# Altium PCB brd.PcbDoc
Units mm, origin at the board's own origin, x right, y up, seen from the top; angles counter-clockwise.
Board outline 79 x 50 mm, 2 copper layers (Top Layer, Bottom Layer); 10 components, 19 nets, 64 pads, 0 vias.
Unrouted connection lines stored in the file: 1.
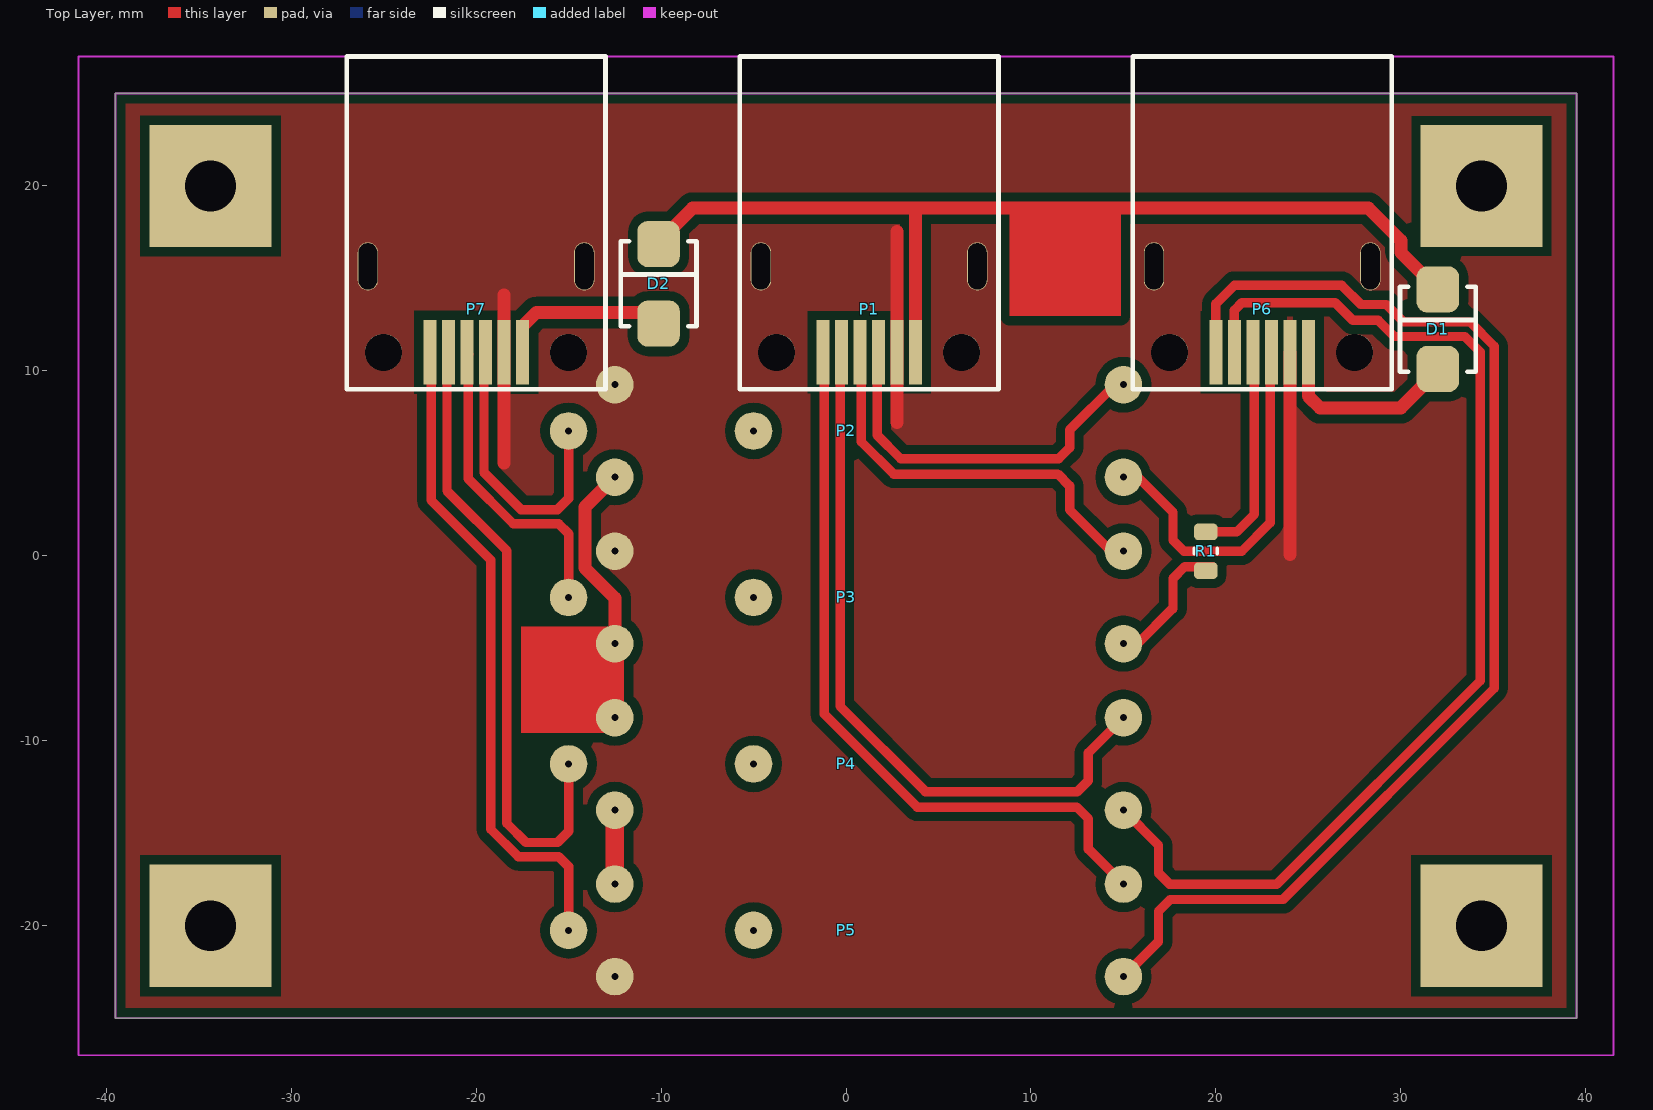
[diagram p0: Top Layer view]
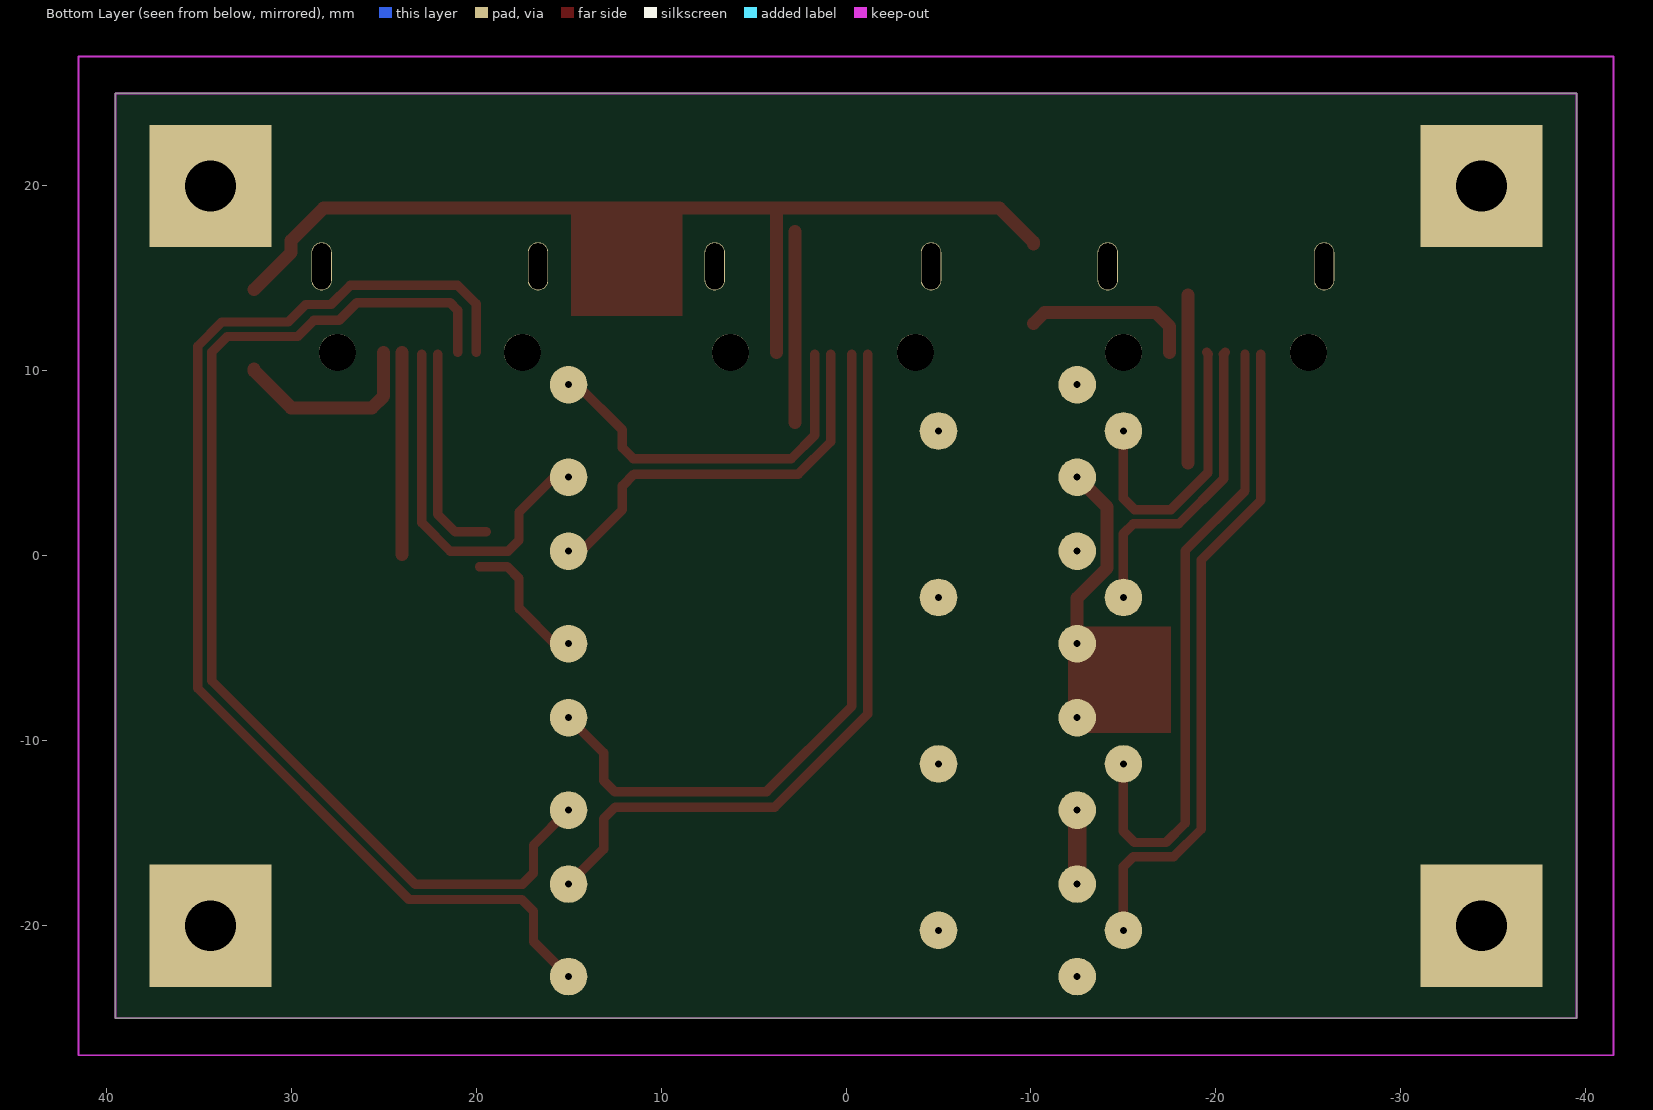
[diagram p1: Bottom Layer view, seen from below]

## Layer stack, top to bottom
Top Solder: solder mask 0.0102, Solder Resist, Dk 3.5
Top Layer: signal copper 0.0356
Dielectric 1: dielectric 0.32, FR-4, Dk 4.8
Bottom Layer: signal copper 0.0356
Bottom Solder: solder mask 0.0102, Solder Resist, Dk 3.5

## Board outline
-39.5,-25 39.5,-25 39.5,25 -39.5,25

## Design rules (kind name [scope] priority, off if disabled: settings)
Clearance [All] p1: gap=0.254 ignorepadtopadclearanceinfootprint=FALSE except(0: Arc-Hole Track-Hole SMDPad-Hole THPad-Hole Via-Hole Fill-Hole Poly-Hole Region-Hole Text-Hole; 0.5: Arc-Fill Arc-Poly Arc-Region Track-Fill Track-Poly Track-Region SMDPad-Fill SMDPad-Poly SMDPad-Region THPad-Fill THPad-Poly THPad-Region Via-Fill Via-Poly Via-Region Fill-Fill Fill-Poly Fill-Region Poly-Poly Poly-Region Region-Region)
ComponentClearance [All] p1 off: gap=0.254 collisioncheckmode=3 verticalgap=0.254 showdistances=FALSE
PolygonConnect [All] p1: connectstyle=Direct reliefconductorwidth=0.254 reliefentries=4 polygonreliefangle="90 Angle" airgapwidth=0.254
RoutingVias [All] p1: holewidth=0.711 width=1.27 viastyle="Through Hole" minholewidth=0.711 minwidth=1.27 maxholewidth=0.711 maxwidth=1.27
SolderMaskExpansion [All] p1: expansion=0.102
Width [All] p1: maxlimit=25.4 minlimit=0.127 preferedwidth=0.254
29 further rules are at their usual default settings.

## Components (designator, comment, footprint, x,y, rotation, side; value= is the part's Value field where it differs from the comment)
D1 "SS16" RR_SMB 32,12.25 r90 top value="DIODE SCHOTTKY 60V 1A SMA"
D2 "SS16" RR_SMB -10.135,14.707 r90 top value="DIODE SCHOTTKY 60V 1A SMA"
P1 "FireWire 356921650" DS1102 1.25,11 r180 top
P2 "18284" RES55A -5,6.75 r180 top
P3 "18284" RES55A -5,-2.25 r180 top
P4 "61469" RES55A -5,-11.25 r180 top
P5 "61469" RES55A -5,-20.25 r180 top
P6 "FireWire 356921650" DS1102 22.5,11 r180 top
P7 "FireWire 356921650" DS1102 -20,11 r180 top
R1 "Res1" 0805 19.455,0.25 r270 top value=1K

## Footprints (in the part's own frame and the unit in brackets; to place one, negate y for a bottom-side part, rotate by r counter-clockwise, add the part's x,y. Pads: shape width x height; smd on the part's side, far side on the other; paste and mask are expansions set on the pad)
0805 [mm] "Chip Capacitor"
  rrect50% 0.9x1.27 smd: 1(-1.05,0) 2(1.05,0)
  silkscreen extent -0.15,-0.63 0.15,0.63, body extent -1.05,-0.67 1.05,0.68, height 0.8
DS1102 [mm]
  rect 0.7x3.5 smd: 1(-2.5,0) 2(-1.5,0) 3(-0.5,0) 4(0.5,0) 5(1.5,0) 6(2.5,0)
  round 2 hole 2: 7(-5,0) 7(5,0)
  oval 1.1x2.6 hole 1 slot 2.5 at 90 deg: 8(-5.85,-4.65) 8(5.85,-4.65)
  silkscreen extent -7,-16 7,2
RES55A [mil]
  round 80 hole 15: 0(0,0) 1(-787.4,98.43) 2(-787.4,-98.43) 3(393.7,0) 4(295.28,-98.43) 5(295.28,98.43)
  body extent -768,-177 374,177, height 394
RR_SMB [mm]
  rrect50% 2.5x2.3 smd mask+0.025: 1(-2.15,0) 2(2.15,0)
  silkscreen extent -2.3,-2.05 2.3,2.05, body extent -2.75,-1.93 2.85,2.02, height 2.65

## Part data
D1 D2: "DIODE SCHOTTKY 60V 1A SMA", Manufacturer=FairchildSemiconductor, Package=SMA, Cost=0,43, Order Number=SS16T3G
P1 P6 P7: library part "Header 8", "IEEE 1394 (DS1102), SMD розетка на плату (OBSOLETE)", LatestRevisionDate=17-Jul-2002, LatestRevisionNote="Re-released for DXP Platform.", Publisher="Altium Limited"
P2 P3 P4 P5: library part "Header 5", "Header, 5-Pin", LatestRevisionDate=17-Jul-2002, LatestRevisionNote="Re-released for DXP Platform.", Publisher="Altium Limited"
R1: "Resistor", LatestRevisionDate=17-Jul-2002, LatestRevisionNote="Re-released for DXP Platform.", PackageDescription="Axial Device, Thru-Hole; 2 Leads; 0.3 in Pin Spacing", PackageReference=AXIAL-0.3, Published=8-Jun-2000, Publisher="Altium Limited"

## Free pads (board coordinates)
  rect 6.6x6.6 hole 2.75: M(-34.35,-20) M(-34.35,20) M(34.35,-20) M(34.35,20)

## Nets (pads, with @x,y where several pads share a name; then routed paths per layer and width w, separated by ;. In a path a pad name is that pad's centre, name@x,y a point inside that pad or via, vN(x,y) a via of type N, cw(c..) or ccw(c..) an arc to the next point about the centre after c; other vN are vias at no path point)
GND: P1.2 P1.7 P1.8 P2.4 P3.4 P5.5 P6.2 P6.7 P6.8 P7.2 P7.7 P7.8 | length 30.3
  Top Layer w0.7: -18.5,5.029 P7.2 -18.5,14.097 ; 2.75,7.214 P1.2 2.75,17.526 ; 24,0.076 P6.2
NetD1_1: D1.1 P6.1 | length 10.6
  Top Layer w0.7: P6.1 25,8.63 25.629,8.001 30.001,8.001 32,10 D1.1
NetD1_2: D1.2 D2.2 P1.1 | length 52.9
  Top Layer w0.7: D2.2 -10.135,16.957 -8.295,18.796 28.251,18.796 29.997,17.05 29.997,16.403 D1.2 ; P1.1 3.75,18.745
NetD2_1: D2.1 P7.1 | length 9.3
  Top Layer w0.7: P7.1 -17.5,12.4 -16.743,13.157 -10.735,13.157 D2.1
NetP1_3: P1.3 P2.2 | length 20.4
  Top Layer w0.508: P1.3@1.68,10.9 1.68,6.528 2.958,5.25 11.494,5.25 12.09,5.846 12.09,6.803 14.537,9.25 P2.2
NetP1_4: P1.4 P3.2 | length 22.1
  Top Layer w0.508: P1.4@0.82,10.9 0.82,6.172 2.576,4.416 11.455,4.416 12.09,3.781 12.09,2.485 14.326,0.25 P3.2
NetP1_5: P1.5 P4.2 | length 38.8
  Top Layer w0.508: P1.5@-0.32,10.9 -0.32,-8.135 4.295,-12.75 12.51,-12.75 13.106,-12.154 13.106,-10.644 P4.2
NetP1_6: P1.6 P5.2 | length 40.4
  Top Layer w0.508: P1.6@-1.18,10.9 -1.18,-8.554 3.851,-13.584 12.471,-13.584 13.106,-14.219 13.106,-15.856 P5.2
NetP2_1: P2.1 P6.3 | length 20.2
  Top Layer w0.508: P2.1 15.787,4.25 17.681,2.356 17.681,0.846 18.277,0.25 21.398,0.25 22.93,1.782 P6.3@22.93,10.9
NetP2_3: P2.3 P7.3 | length 15.8
  Top Layer w0.508: P7.3@-19.6,10.9 P7.3 ; P7.3@-19.57,10.9 -19.57,4.5 -17.57,2.5 -15.6,2.5 -15,3.1 P2.3
NetP2_5: P2.5 P3.5 P4.4 | length 14.3
  Top Layer w0.7: P3.5 -12.5,-2.283 -14.12,-0.663 -14.12,2.63 P2.5
  Top Layer w1: P4.4 P3.5
NetP3_1: P3.1 R1.2 | length 6.7
  Top Layer w0.508: P3.1@15.761,-4.75 17.654,-2.856 ; 17.681,-2.856 17.681,-1.219 18.316,-0.584 R1.2@19.815,-0.584
NetP3_3: P3.3 P7.4 | length 17
  Top Layer w0.508: P7.4 P7.4@-20.4,10.9 ; P7.4@-20.43,10.9 -20.43,4.174 -17.994,1.738 -15.538,1.738 -15,1.2 P3.3
NetP4_1: P4.1 P6.5 | length 61
  Top Layer w0.508: P4.1 16.894,-15.644 16.894,-17.154 17.49,-17.75 23.296,-17.75 34.29,-6.756 34.29,11.02 33.452,11.858 29.646,11.858 28.778,12.725 27.407,12.725 26.441,13.691 21.412,13.691 21,13.278 P6.5
NetP4_3: P4.3 P7.5 | length 34.4
  Top Layer w0.508: P7.5@-21.57,10.9 -21.57,3.511 -18.339,0.279 -18.339,-14.461 -17.3,-15.5 -15.6,-15.5 -15,-14.9 P4.3
NetP4_5: P4.5 P5.4 | length 4
  Top Layer w1: P5.4 P4.5
NetP5_1: P5.1 P6.6 | length 65.4
  Top Layer w0.508: P5.1 16.894,-20.856 16.894,-19.219 17.529,-18.584 23.631,-18.584 35.052,-7.163 35.052,11.335 33.745,12.642 30.157,12.642 29.21,13.589 27.838,13.589 26.797,14.63 21.006,14.63 20,13.625 P6.6
NetP5_3: P5.3 P7.6 | length 35.5
  Top Layer w0.508: P7.6@-22.43,10.9 -22.43,2.999 -19.202,-0.229 -19.202,-14.783 -17.723,-16.262 -15.538,-16.262 -15,-16.8 P5.3
NetP6_4: P6.4 R1.1 | length 11.7
  Top Layer w0.508: R1.1 21.134,1.3 22.07,2.236 P6.4@22.07,10.9
pads on no net: P2.0 P3.0 P4.0 P5.0

## Polygon pours and split planes (outlines as drawn)
GND on Top Layer (solid, remove dead copper, pour order 0): -39.5,-25 39.5,-25 39.5,25 -39.5,25

## Keep-outs
Keep-Out Layer:
  lines w0.1: -41.5,-27 -41.5,27 41.5,27 41.5,-27 -41.5,-27 ; -39.5,-25 -39.5,25 39.5,25 39.5,-25 -39.5,-25

## Other copper
Top Layer:
  rectangle net NetD1_2: 8.839,12.954 14.859,18.644
  rectangle net NetP2_5: -17.578,-9.576 -12.598,-3.835